# Altium PCB Copy of HARDWARE_V2.PcbDoc
Units mil, origin at the board's own origin, x right, y up, seen from the top; angles counter-clockwise.
Board outline 3937.01 x 2775 mil, 2 copper layers (Top Layer, Bottom Layer); 50 components, 31 nets, 227 pads, 22 vias.
Unrouted connection lines stored in the file: 27.
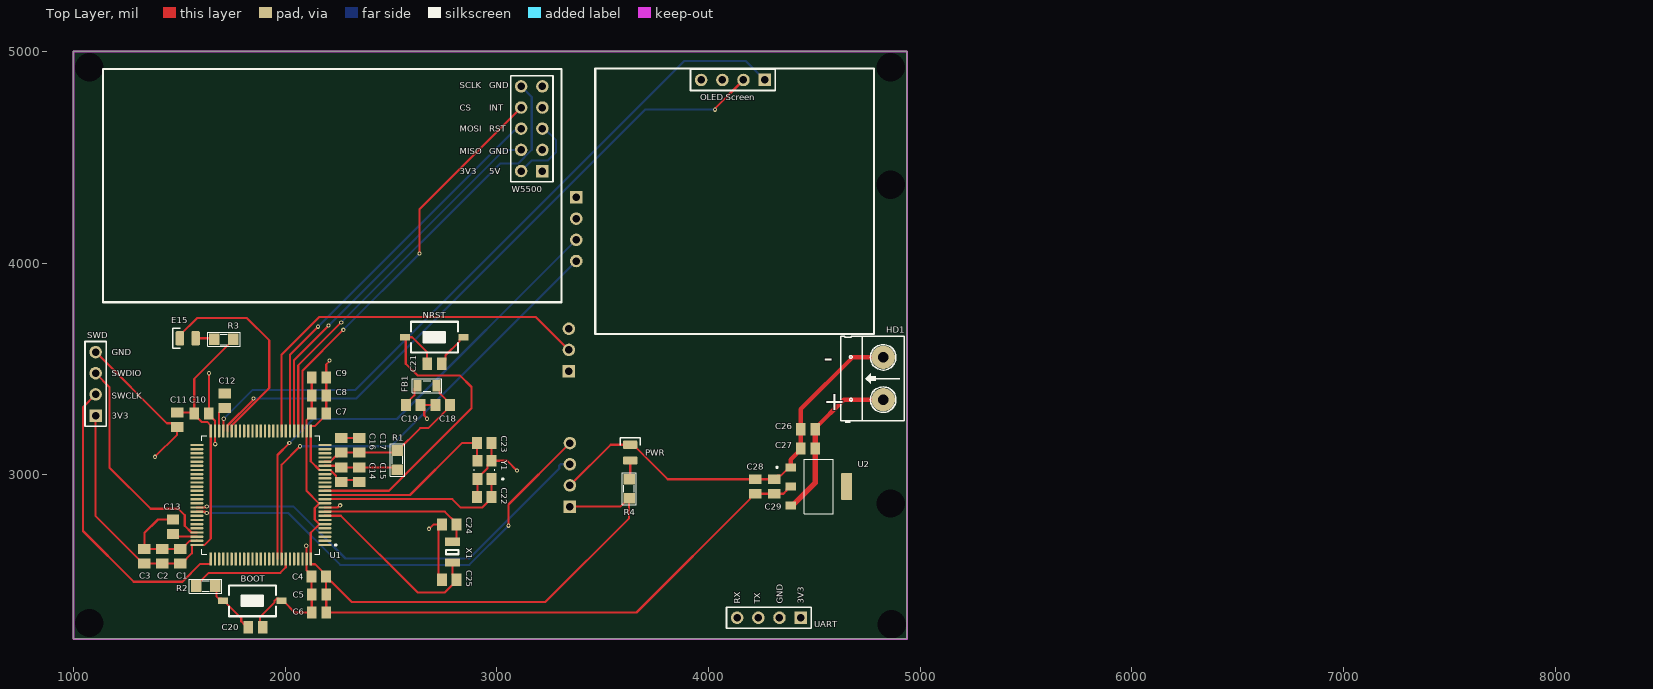
[diagram p0: Top Layer view]
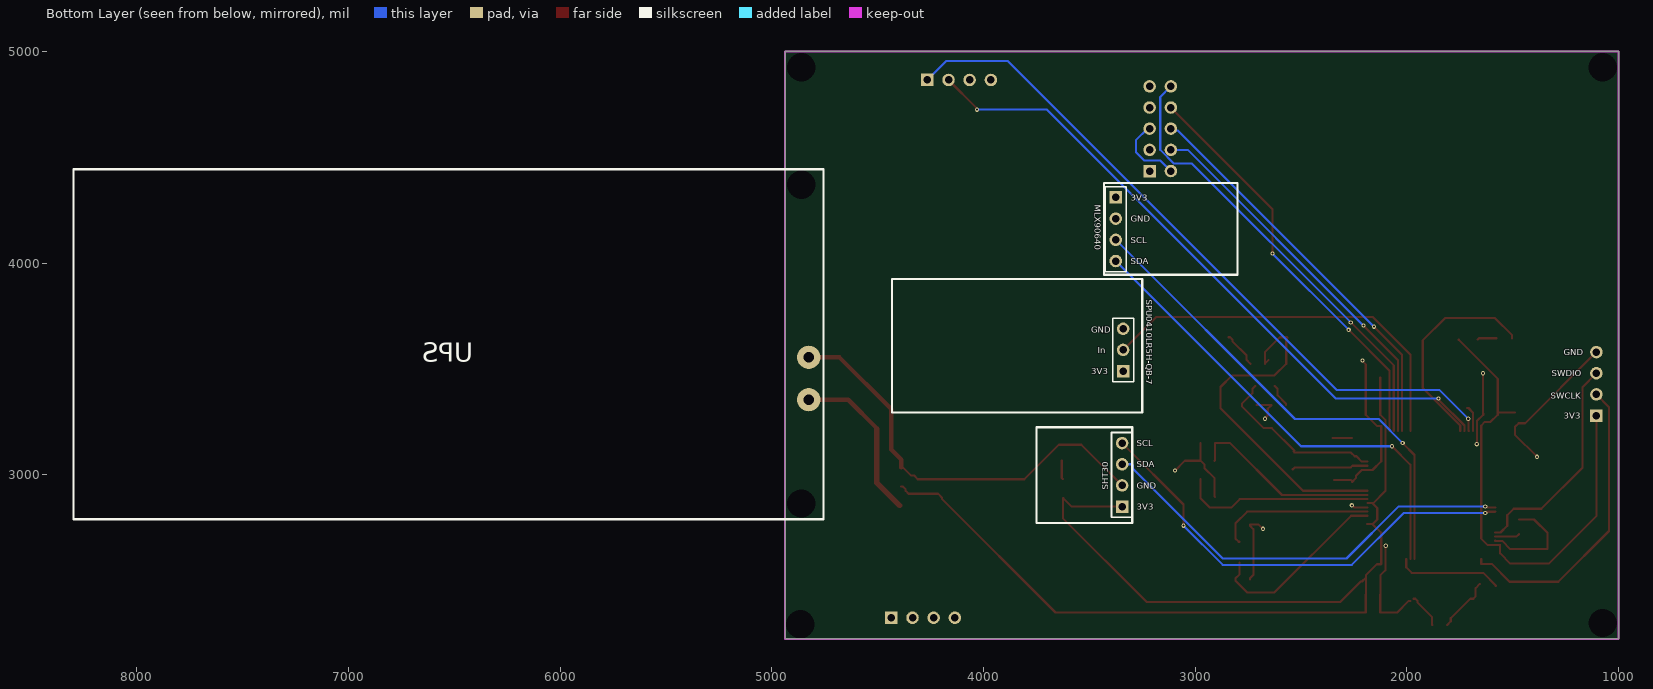
[diagram p1: Bottom Layer view, seen from below]

## Layer stack, top to bottom
Top Solder: solder mask 0.4, Solder Resist, Dk 3.5
Top Layer: signal copper 1.4
Dielectric 1: dielectric 12.6, FR-4, Dk 4.8
Bottom Layer: signal copper 1.4
Bottom Solder: solder mask 0.4, Solder Resist, Dk 3.5

## Board outline
1000,2225 1000,5000 4937.01,5000 4937.01,2225

## Design rules (kind name [scope] priority, off if disabled: settings)
Clearance [All] p1: gap=1 ignorepadtopadclearanceinfootprint=TRUE
Creepage [All] p1: checkdistance=10 applytopolygonpour=TRUE
PolygonConnect [All] p1: connectstyle=Relief reliefconductorwidth=10 reliefentries=4 polygonreliefangle="90 Angle" airgapwidth=10
RoutingVias [All] p1: holewidth=28 width=50 viastyle="Through Hole" minholewidth=28 minwidth=50 maxholewidth=28 maxwidth=50
SolderMaskExpansion [All] p1: expansion=4 istentingtop=FALSE
Width [All] p1: maxlimit=50 minlimit=10 preferedwidth=10 minimp=50.000000 maximp=50.000000 favimp=50.000000
30 further rules are at their usual default settings.

## Classes and differential pairs
component class Display: "OLED Screen" UART
component class Sensors: MLX90640 SHT30 SPU0410LR5H-QB-7
component class Power: C26 C27 C28 C29 HD1 PWR R4 U2
component class MCU: BOOT C1 C2 C3 C4 C5 C6 C7 C8 C9 C10 C11 C12 C13 C14 C15 C16 C17 C18 C19 C20 C21 C22 C23 C24 C25 E15 FB1 NRST R1 R2 R3 SWD U1 X1 Y1
component class Ethernet: W5500

## Components (designator, comment, footprint, x,y, rotation, side; value= is the part's Value field where it differs from the comment)
BOOT "SW-SMD" SW-SMD 1845,2405 r0 top
C1 "100nF" CAPC2012X145N 1505,2615 r270 top
C2 "100nF" CAPC2012X145N 1420,2615 r270 top
C3 "100nF" CAPC2012X145N 1335,2615 r270 top
C4 "100nF" CAPC2012X145N 2159.29,2520 r0 top
C5 "100nF" CAPC2012X145N 2160,2435 r0 top
C6 "100nF" CAPC2012X145N 2160,2350 r0 top
C7 "100nF" CAPC2012X145N 2160,3290 r180 top
C8 "100nF" CAPC2012X145N 2160,3375 r180 top
C9 "100nF" CAPC2012X145N 2160,3460 r180 top
C10 "100nF" CAPC2012X145N 1605,3290 r180 top
C11 "4.7uF" CAPC2012X145N 1490,3260 r90 top
C12 "2.2uF" CAPC2012X145N 1715,3350 r270 top
C13 "2.2uF" CAPC2012X145N 1470,2755 r270 top
C14 "100nF" CAPC2012X145N 2265,3000.71 r90 top
C15 "1uF" CAPC2012X145N 2350,3000.71 r90 top
C16 "100nF" CAPC2012X145N 2265,3140 r270 top
C17 "1uF" CAPC2012X145N 2350,3140 r270 top
C18 "100nF" CAPC2012X145N 2745,3330 r0 top
C19 "100nF" CAPC2012X145N 2605,3330 r180 top
C20 "100nF" CAPC2012X145N 1860,2280 r180 top
C21 "100nF" CAPC2012X145N 2705,3525 r180 top
C22 "10pF" CAPC2012X145N 2940,2895 r0 top
C23 "10pF" CAPC2012X145N 2940,3150 r180 top
C24 "10pF" CAPC2012X145N 2775,2765 r0 top
C25 "10pF" CAPC2012X145N 2775,2505 r0 top
C26 "100nF" CAPC2012X145N 4470,3215 r0 top
C27 "10uF" CAPC2012X145N 4470,3125 r0 top
C28 "100nF" CAPC2012X145N 4220,2945 r270 top
C29 "10uF" CAPC2012X145N 4310,2945 r270 top
E15 "BLUE" LED_0805_BLUE 1540,3645 r0 top
FB1 "Ferrit Bead" RES-SMD-0805 2670,3420 r180 top
HD1 "Header 2" HED2 4825,3355 r90 top
MLX90640 "Header 4" HDR1X4 3375,4310 r270 bottom
NRST "SW-SMD" SW-SMD 2705,3650 r0 top
"OLED Screen" "Header 4" HDR1X4 4265,4865 r180 top
PWR "BLUE" LED_0805_BLUE 3630,3105 r270 top
R1 "47" SM-0805 2530,3070 r90 top value=1K
R2 "10K" SM-0805 1625,2475 r0 top value=1K
R3 "10K" SM-0805 1710,3640 r180 top value=1K
R4 "10K" SM-0805 3625,2935 r90 top value=1K
SHT30 "Header 4" HDR1X4 3345,2850 r90 bottom
SPU0410LR5H-QB-7 "Header 3" HDR1X3 3340,3490 r90 bottom
SWD "Header 4" HDR1X4 1105,3280 r90 top
U1 "STM32H743VIT6" QFP50P1600X1600X160-100N 1885,2905 r180 top
U2 "AMS1117-3.3" SOT229P700X180-4N 4520,2945 r0 top
UART "Header 4" HDR1X4 4435,2325 r180 top
W5500 "Header 5X2" HDR2X5 3215,4435 r90 top
X1 "32.768kHz" XTAL_3215-2 2790,2635 r270 top
Y1 "25MHz" XTAL_ABM8G-25.000MHZ-B4Y-T 2941.54,3023.31 r180 top

## Footprints (in the part's own frame and the unit in brackets; to place one, negate y for a bottom-side part, rotate by r counter-clockwise, add the part's x,y. Pads: shape width x height; smd on the part's side, far side on the other; paste and mask are expansions set on the pad)
CAPC2012X145N [mm]
  rect 1.17x1.47 smd: 1(-0.871,0) 2(0.871,0)
  body extent -1,-0.63 1,0.63, height 1.45
HDR1X3 [mm] "Connector; Header; 3 Position"
  rect 1.5x1.5 hole 0.9: 1(0,0)
  round 1.5 hole 0.9: 2(2.54,0) 3(5.08,0)
  silkscreen extent -1.27,-1.27 6.35,1.27, body extent -1.27,-1.27 6.35,1.27, height 7
HDR1X4 [mm] "Connector; Header; 4 Position"
  rect 1.5x1.5 hole 0.9: 1(0,0)
  round 1.5 hole 0.9: 2(2.54,0) 3(5.08,0) 4(7.62,0)
  silkscreen extent -1.27,-1.27 8.89,1.27, body extent -1.27,-1.27 8.89,1.27, height 7
HDR2X5 [mm] "Connector; Header; 5x2 Position"
  rect 1.5x1.5 hole 0.9: 1(0,0)
  round 1.5 hole 0.9: 2(0,2.54) 3(2.54,0) 4(2.54,2.54) 5(5.08,0) 6(5.08,2.54) 7(7.62,0) 8(7.62,2.54) 9(10.16,0) 10(10.16,2.54)
  silkscreen extent -1.27,-1.27 11.43,3.81, body extent -1.27,-1.27 11.43,3.81, height 7
HED2 [mil] "Header 2, 2 pin, hight 300mil, Pin to Pin 200, Colour Green"
  round 110 hole 50: 1(0,0) 2(200,0)
  silkscreen extent -106,-100 300,200, body extent -92,-140 302,155, height 394
LED_0805_BLUE [mm]
  rrect25% 1x1.7 smd: A(0.95,0) K(-0.95,0)
  silkscreen extent -1.8,-1.2 -0.9,1.2, body extent -1,-0.63 1,0.63, height 1.12
QFP50P1600X1600X160-100N [mm]
  rrect50% 1.56x0.28 smd: 1(-7.68,6) 2(-7.68,5.5) 3(-7.68,5) 4(-7.68,4.5) 5(-7.68,4) 6(-7.68,3.5) 7(-7.68,3) 8(-7.68,2.5) 9(-7.68,2) 10(-7.68,1.5) 11(-7.68,1) 12(-7.68,0.5) 13(-7.68,0) 14(-7.68,-0.5) 15(-7.68,-1) 16(-7.68,-1.5) 17(-7.68,-2) 18(-7.68,-2.5) 19(-7.68,-3) 20(-7.68,-3.5) 21(-7.68,-4) 22(-7.68,-4.5) 23(-7.68,-5) 24(-7.68,-5.5) 25(-7.68,-6) 51(7.68,-6) 52(7.68,-5.5) 53(7.68,-5) 54(7.68,-4.5) 55(7.68,-4) 56(7.68,-3.5) 57(7.68,-3) 58(7.68,-2.5) 59(7.68,-2) 60(7.68,-1.5) 61(7.68,-1) 62(7.68,-0.5) 63(7.68,0) 64(7.68,0.5) 65(7.68,1) 66(7.68,1.5) 67(7.68,2) 68(7.68,2.5) 69(7.68,3) 70(7.68,3.5) 71(7.68,4) 72(7.68,4.5) 73(7.68,5) 74(7.68,5.5) 75(7.68,6)
  rrect50% 0.28x1.56 smd: 26(-6,-7.68) 27(-5.5,-7.68) 28(-5,-7.68) 29(-4.5,-7.68) 30(-4,-7.68) 31(-3.5,-7.68) 32(-3,-7.68) 33(-2.5,-7.68) 34(-2,-7.68) 35(-1.5,-7.68) 36(-1,-7.68) 37(-0.5,-7.68) 38(0,-7.68) 39(0.5,-7.68) 40(1,-7.68) 41(1.5,-7.68) 42(2,-7.68) 43(2.5,-7.68) 44(3,-7.68) 45(3.5,-7.68) 46(4,-7.68) 47(4.5,-7.68) 48(5,-7.68) 49(5.5,-7.68) 50(6,-7.68) 76(6,7.68) 77(5.5,7.68) 78(5,7.68) 79(4.5,7.68) 80(4,7.68) 81(3.5,7.68) 82(3,7.68) 83(2.5,7.68) 84(2,7.68) 85(1.5,7.68) 86(1,7.68) 87(0.5,7.68) 88(0,7.68) 89(-0.5,7.68) 90(-1,7.68) 91(-1.5,7.68) 92(-2,7.68) 93(-2.5,7.68) 94(-3,7.68) 95(-3.5,7.68) 96(-4,7.68) 97(-4.5,7.68) 98(-5,7.68) 99(-5.5,7.68) 100(-6,7.68)
  silkscreen extent -9.1,-7.1 7.1,7.1, body extent -8,-8 8,8, height 1.6
RES-SMD-0805 [mil]
  rect 39.37x55 smd: 1(-45,0) 2(45,0)
  silkscreen extent -70,-34 70,33, body extent -39,-25 39,25, height 31
SM-0805 [mil] "Compoment SMD 80x50mil"
  rect 50x55 smd: 1(-45,0) 2(45,0)
  silkscreen extent -77,-34 76,33, body extent -40,-27 40,23, height 24
SOT229P700X180-4N [mm]
  rrect15% 1.31x0.93 smd: 1(-3.345,2.29) 2(-3.345,0) 3(-3.345,-2.29)
  rrect15% 1.31x3.24 smd: 4(3.345,0)
  silkscreen extent -5.1,-3.25 1.75,3.25, body extent -3.25,-3.5 3.25,3.5, height 1.8
SW-SMD [mm] "Switch SMD type"
  rect 1.2x0.8 smd: 1(-3.5,0) 2(3.5,0)
  silkscreen extent -2.82,-1.85 2.82,1.85, body extent -3.05,-1.85 3.05,1.85, height 2.5
XTAL_3215-2 [mm]
  rrect10% 1x1.8 smd: 1(-1.25,0) 2(1.25,0)
  silkscreen extent -0.25,-0.75 0.25,0.75, body extent -1.6,-0.75 1.6,0.75, height 0.91
XTAL_ABM8G-25.000MHZ-B4Y-T [mm]
  rect 1.2x1.4 smd: 1(-0.85,1.1) 2(-0.85,-1.1) 3(0.85,-1.1) 4(0.85,1.1)
  silkscreen extent -2.3,-0.08 1.25,1.2, body extent -1.6,-1.24 1.6,1.24, height 0.99

## Part data
BOOT NRST: "Switch", LatestRevisionDate=17-Jul-2002, LatestRevisionNote="Re-released for DXP Platform.", PackageReference=SPST-2, Published=24-Mar-1999, Publisher="Altium Limited"
C1 C2 C3 C4 C5 C6 C7 C8 C9 C10 C12 C13 C14 C15 C16 C17 C18 C19 C20 C21 C22 C23 C24 C25 C26 C27 C28 C29: library part VJ0805A390GXCAP, "39 pF Â±2% 200V Ceramic Capacitor C0G, NP0 0805 (2012 Metric)", Package="2012 Vishay Vitramon", Check_prices=https://www.snapeda.com/parts/VJ0805A390GXCAP/Vishay/view-part/?ref=eda, MF="Vishay Vitramon", MP=VJ0805A390GXCAP, SnapEDA_Link=https://www.snapeda.com/parts/VJ0805A390GXCAP/Vishay/view-part/?ref=snap
C11: library part CAP_TAN_SMD, "Polazied Tantalum Capacitor"
E15 PWR: library part LED_0805_BLUE, "LED 0805 BLUE SMD"
FB1: "Generic Ferrit Bead"
HD1: library part Hed2, "Header 2 (Green)"
MLX90640 "OLED Screen" SHT30 SWD UART: "Header, 4-Pin", LatestRevisionDate=17-Jul-2002, LatestRevisionNote="Re-released for DXP Platform.", Publisher="Altium Limited"
R1 R2 R3 R4: library part RM, "Resistor SMD"
SPU0410LR5H-QB-7: "Header, 3-Pin", LatestRevisionDate=17-Jul-2002, LatestRevisionNote="Re-released for DXP Platform.", Publisher="Altium Limited"
U1: "ARMÂ® CortexÂ®-M7 STM32H7 Microcontroller IC 32-Bit Single-Core 480MHz 2MB (2M x 8) FLASH 100-LQFP (14x14)", Package="LQFP-100 STMicroelectronics", Check_prices=https://www.snapeda.com/parts/STM32H743VIT6/STMicroelectronics/view-part/?ref=eda, MF=STMicroelectronics, MP=STM32H743VIT6, SnapEDA_Link=https://www.snapeda.com/parts/STM32H743VIT6/STMicroelectronics/view-part/?ref=snap
U2: "Sot223/Pkg 1-Amp 3.3-Volt Low Drop Out Voltage Regulatator", Package="SOT-223 Seeed Technology", Check_prices=https://www.snapeda.com/parts/AMS1117-3.3/Advanced+Monolithic+Systems/view-part/?ref=eda, MF="Advanced Monolithic Systems", MP=AMS1117-3.3, SnapEDA_Link=https://www.snapeda.com/parts/AMS1117-3.3/Advanced+Monolithic+Systems/view-part/?ref=snap
W5500: "Header, 5-Pin, Dual row", LatestRevisionDate=17-Jul-2002, LatestRevisionNote="Re-released for DXP Platform.", Publisher="Altium Limited"
X1: library part XTAL_3215, "Crystal SMD 3215"
Y1: library part ABM8G-25.000MHZ-B4Y-T, "25 MHz Â±30ppm Crystal 10pF 60 Ohms 4-SMD, No Lead", Package="SMD-4 Abracon", Availability="In Stock", Check_prices=https://www.snapeda.com/parts/ABM8G-25.000MHZ-B4Y-T/Abracon+LLC/view-part/?ref=eda, MF=Abracon, MP=ABM8G-25.000MHZ-B4Y-T, Price=None, Purchase-URL=https://pricing.snapeda.com/search/part/ABM8G-25.000MHZ-B4Y-T/?ref=eda, SnapEDA_Link=https://www.snapeda.com/parts/ABM8G-25.000MHZ-B4Y-T/Abracon+LLC/view-part/?ref=snap

## Free pads (board coordinates)
  round 60 hole 133.86 unplated: 2(4865,2295) 3(4860,2865) 4(4860,4370) 5(4860,4925) 6(1075,4925) 7(1075,2300)

## Via types
v1: diameter 20, hole 10, Top Layer to Bottom Layer, 22 vias

## Nets (pads, with @x,y where several pads share a name; then routed paths per layer and width w, separated by ;. In a path a pad name is that pad's centre, name@x,y a point inside that pad or via, vN(x,y) a via of type N, cw(c..) or ccw(c..) an arc to the next point about the centre after c; other vN are vias at no path point)
12V: C26.2 C27.2 HD1.1 U2.3 | length 794.7
  Top Layer w10: U2.3 U2.3@4395.79,2854.84
  Top Layer w20: C26.2 4504.29,3220.91 4638.39,3355 HD1.1
  Top Layer w25: U2.3@4395.79,2854.84 4504.29,2963.35 C27.2 C26.2
+3V3: "OLED Screen.3" C1.2 C2.2 C3.2 C4.2 C5.2 C6.2 C7.2 C8.2 C9.2 C10.2 C11.2 C19.2 C28.2 C29.2 FB1.2 MLX90640.1 R3.1 R4.1 SHT30.1 SPU0410LR5H-QB-7.1 SWD.1 U1.6 U1.11 U1.27 U1.50 U1.75 U1.100 U2.2 UART.1 W5500.2 W5500.5 | length 8545.6
  Top Layer w10: SWD.1 1105,2804.8 1329.09,2580.71 C3.2 C2.2 C1.2 1510.91,2580.71 1559.69,2629.49 1559.69,2668.27 1560.2,2668.78 U1.75 ; C11.2 1566.42,3294.29 C10.2 ; U1.75@1582.64,2667.95 1617.95,2667.95 1648.78,2698.79 U1.50 1648.78,3232.56 1631.34,3250 1604.8,3250 1570.71,3284.09 C10.2 ; R3.1 1755,3637.5 1570.71,3453.21 C10.2 ; C9.2 C8.2 C7.2 2125.71,3284.09 2101.54,3259.92 U1.27 2101.54,2923.92 2159.32,2866.14 U1.11@2162.68,2866.14 ; U1.11@2186.85,2866.14 U1.11@2162.68,2866.14 ; U1.6 U1.6@2162.17,2767.2 ; C19.2 2570.71,3335.91 2610.32,3375.51 2610.32,3405.31 FB1.2 ; SHT30.1 3582.5,2850 3622.5,2890 R4.1 3625,2795 3230,2400 2313.58,2400 2217.52,2496.06 2211.61,2496.06 C4.2@2193.58,2514.09 ; U2.2 4380.83,2945 4367.52,2931.69 4367.52,2924.29 4353.94,2910.71 C29.2 4214.09,2910.71 4196.06,2892.68 4196.06,2886.77 3659.29,2350 C6.2 C5.2 2193.58,2435.71 C4.2@2193.58,2514.09 ; U1.6@2162.17,2767.2 2140,2789.37 2140,2843.46 U1.11@2162.68,2866.14 ; U1.6@2162.17,2767.2 2121.22,2726.26 U1.100 2121.22,2578.27 2121.73,2577.76 2141.73,2577.76 2193.58,2525.91 C4.2 C4.2@2193.58,2514.09
  Bottom Layer w10: W5500.2 3164.69,4484.69 3239.69,4484.69 3280,4525 3280,4580 3225,4635 W5500.5
ADC1_IN8: SPU0410LR5H-QB-7.2 U1.33 | length 1855
  Top Layer w10: U1.33 1983.43,3568.43 2160,3745 3185,3745 SPU0410LR5H-QB-7.2
BOOT0: R2.1 U1.94 | length 500.6
  Top Layer w10: R2.1 1580,2477.5 1639.71,2537.21 1977.21,2537.21 2003.11,2563.11 U1.94
GND: "OLED Screen.4" BOOT.2 C1.1 C2.1 C3.1 C4.1 C5.1 C6.1 C7.1 C8.1 C9.1 C10.1 C11.1 C12.1 C13.1 C14.1 C15.1 C16.1 C17.1 C18.1 C19.1 C20.1 C21.1 C22.1 C23.1 C24.1 C25.1 C26.1 C27.1 C28.1 C29.1 HD1.2 MLX90640.2 NRST.2 PWR.K SHT30.2 SPU0410LR5H-QB-7.3 SWD.4 U1.10 U1.19 U1.26 U1.49 U1.74 U1.99 U2.1 UART.2 W5500.9 Y1.2 Y1.4 | length 6265.5
  Top Layer w10: SWD.4 1441.26,3243.74 1471.97,3243.74 C11.1 1490,3190 v1(1385,3085) ; C13.1 1399.29,2789.29 1335,2725 C3.1 C2.1 C1.1 1510.91,2649.29 1549.57,2687.95 1582.13,2687.95 U1.74 ; v1(1640,3480) 1640,3290.71 C10.1 1639.29,3284.09 1668.46,3254.92 U1.49 1668.98,3206.85 1668.98,3146.02 v1(1670,3145) ; C20.1@1879.29,2290 1880.87,2291.58 1880.87,2328.08 1949.17,2396.38 1949.17,2404.25 1959.92,2415 BOOT.2@1967.8,2415 ; BOOT.2 1990.67,2405 2045.67,2350 C6.1 C5.1 2125,2435.71 C4.1 2125,2525.91 2101.54,2549.37 U1.99 2101.02,2603.15 2101.02,2663.98 v1(2100,2665) ; U1.10 2247.24,2845.94 2257.29,2856 v1(2260,2856) ; v1(2210,3540) 2210,3537.29 2194.29,3521.59 C9.1 C8.1 C7.1 2194.29,3284.09 2141.73,3231.54 2121.73,3231.54 2121.22,3231.02 U1.26 2121.22,3064.06 2162.17,3023.11 U1.19 2212.56,3023.11 2241.06,2994.61 2241.06,2984.45 C14.1@2259.09,2966.42 ; C16.1@2259.09,3174.29 C16.1 C17.1 ; C14.1@2265,2975.71 C15.1@2345,2975.71 ; v1(2670,3265) 2670,3267.71 2657.32,3280.38 2657.32,3311.97 C19.1 C18.1 ; v1(2680,2745) 2700,2765 C24.1 2740.71,2759.09 2725,2743.39 2725,2526.61 2740.71,2510.91 C25.1 ; C21.1 2757.32,3543.03 2757.32,3564.53 2824.17,3631.38 2824.17,3639.25 2834.92,3650 NRST.2 ; C22.1 2908.07,2897.36 Y1.4 2908.07,2983.94 2956.38,3032.24 2956.38,3049.41 2974.29,3067.32 C23.1 ; Y1.2 3048.39,3066.61 v1(3095,3020) ; SHT30.2 3537.4,3142.4 PWR.K 3643.78,3142.4 3806.89,2979.29 C28.1 C29.1 4328.03,2997.32 4342.99,2997.32 4380.83,3035.16 U2.1 ; C27.1@4435.71,3119.09 C27.1
  Top Layer w20: U2.1 4388.31,3071.69 C27.1@4435.71,3119.09 ; C27.1 C26.1 4435,3215.71 4435,3310 4680,3555 HD1.2
HSE_IN: C22.2 U1.12 Y1.1 | length 913.1
  Top Layer w10: U1.12 2789.69,2885.32 2830,2845 2930.2,2845 2975,2889.8 Y1.1
HSE_OUT: C23.2 U1.13 Y1.3 | length 904.2
  Top Layer w10: U1.13 2590,2905 2835,3150 C23.2 2905.71,3068.98 Y1.3
I2C1_SCL: MLX90640.3 U1.92 | length 2323.3
  Top Layer w10: U1.92 1963.74,3093.74 v1(2020,3150)
  Bottom Layer w10: v1(2020,3150) 2133.46,3263.46 2528.46,3263.46 MLX90640.3
I2C1_SDA: MLX90640.4 U1.93 | length 2235.7
  Top Layer w10: U1.93 1983.43,3048.43 v1(2070,3135)
  Bottom Layer w10: v1(2070,3135) 2500,3135 MLX90640.4
I2C2_SCL: "OLED Screen.2" U1.46 | length 3144.7
  Top Layer w10: U1.46 1728.03,3207.87 1728.03,3233.07 1848.09,3353.13 1848.09,3358.09 v1(1850,3360) ; v1(4030,4725) 4031.91,4726.91 4031.91,4731.91 4165,4865
  Bottom Layer w10: v1(1850,3360) 2335,3360 3700,4725 v1(4030,4725)
I2C2_SDA: "OLED Screen.1" U1.47 | length 3350.8
  Top Layer w10: U1.47 1708.35,3207.87 1708.35,3263.35 v1(1710,3265)
  Bottom Layer w10: v1(1710,3265) 1845,3400 2330,3400 3885,4955 4175,4955 4265,4865
I2C3_SCL: SHT30.4 U1.67 | length 2163.2
  Top Layer w10: U1.67 1583.15,2825.75 1621.55,2825.75 1627.29,2820 v1(1630,2820) ; v1(3055,2760) 3055,2860 SHT30.4
  Bottom Layer w10: v1(1630,2820) 2015,2820 2260,2575 2870,2575 v1(3055,2760)
I2C3_SDA: SHT30.3 U1.66 | length 2058.1
  Top Layer w10: U1.66 1583.15,2846.46 1623.75,2846.46 1627.29,2850 v1(1630,2850)
  Bottom Layer w10: v1(1630,2850) 2040,2850 2285,2605 2870,2605 3295,3030 3295,3044.14 3300.86,3050 SHT30.3
LED: E15.K U1.45 | length 1014.6
  Top Layer w10: E15.K 1502.6,3658.78 1583.82,3740 1820,3740 1925,3635 1925,3410.35 1747.72,3233.07 1747.72,3207.87 U1.45
LSE_IN: C24.2 U1.9 X1.1 | length 742.2
  Top Layer w10: U1.9 2753.94,2826.26 2809.29,2770.91 C24.2 2809.29,2698.9 2794.61,2684.21 X1.1
LSE_OUT: C25.2 U1.8 X1.2 | length 888.8
  Top Layer w10: U1.8 2263.43,2806.57 2625,2445 2755.2,2445 2809.29,2499.09 C25.2 2809.29,2510.91 2790,2530.2 X1.2
NetBOOT_1: BOOT.1 C20.2 R2.2 | length 267.9
  Top Layer w10: R2.2@1655,2485 1675,2465 1675,2425.75 1685.75,2415 1692.2,2415 1700.08,2415 1792.68,2322.4 1792.68,2308.03 C20.2@1810.71,2290
NetE15_A: E15.A R3.2 | length 89.7
  Top Layer w10: E15.A 1660,3645 R3.2
NetPWR_A: PWR.A R4.2 | length 89.7
  Top Layer w10: R4.2 3630,2985 PWR.A
NRST: C21.2 NRST.1 U1.14 | length 1651
  Top Layer w10: U1.14 2490.67,2924.69 2880,3314.01 2880,3415 2825,3470 2625,3470 2570,3525 2570,3642.8 2565,3647.8 NRST.1 2600,3650 2670.71,3579.29 C21.2 C21.2@2652.68,3543.03
RX: U1.54 UART.4
SPI1_CS: U1.28 W5500.8 | length 1955.6
  Top Layer w10: U1.28 2081.85,3491.85 v1(2275,3685) ; v1(2634.95,4044.95) 2634.95,4254.95 W5500.8
  Bottom Layer w10: v1(2275,3685) v1(2634.95,4044.95)
SPI1_MISO: U1.30 W5500.4 | length 1818.8
  Top Layer w10: U1.30 2042.48,3542.48 v1(2205,3705)
  Bottom Layer w10: v1(2205,3705) 3035,4535 W5500.4
SPI1_MOSI: U1.31 W5500.6 | length 1894.7
  Top Layer w10: U1.31 2022.8,3567.8 v1(2155,3700)
  Bottom Layer w10: v1(2155,3700) 3081.01,4626.01 3106.01,4626.01 W5500.6
SPI1_SCLK: U1.29 W5500.10 | length 2155.1
  Top Layer w10: U1.29 2062.17,3517.17 v1(2265,3720)
  Bottom Layer w10: v1(2265,3720) 3015.53,4470.53 3100.77,4470.53 3165,4534.76 3165,4785 W5500.10
SWCLK: SWD.2 U1.76 | length 1430.8
  Top Layer w10: SWD.2 1045,3320 1045,2735 1285,2495 1515,2495 1599.69,2579.69 1648.27,2579.69 1648.78,2580.2 U1.76
SWDIO: SWD.3 U1.72 | length 1040.9
  Top Layer w10: SWD.3 1170,3415 1170,3035 1365,2840 1495,2840 1525.96,2809.04 1525.96,2759.31 1557.44,2727.83 U1.72
TX: U1.53 UART.3
VCAP: C12.2 C13.2 U1.48 U1.73 | length 240.8
  Top Layer w10: C13.2 1482.56,2708.15 U1.73 ; U1.48 1688.15,3294.76 1709.09,3315.71 C12.2
VDDA: C16.2 C17.2 C18.2 FB1.1 R1.2 U1.21 | length 825.8
  Top Layer w10: U1.21 2212.56,3062.48 2237.76,3087.68 2246.97,3087.68 C16.2 C17.2 2530.71,3105.71 R1.2@2535,3110 ; R1.2 2532.5,3115 2638.03,3220.53 2675.73,3220.53 2779.29,3324.09 C18.2 2779.29,3335.91 2729.69,3385.51 2729.69,3405.31 FB1.1
VREF: C14.2 C15.2 R1.1 U1.20 | length 360
  Top Layer w10: U1.20 2257.2,3042.8 C14.2 C15.2 2530,3035 R1.1@2540,3025
pads on no net: U1.1 U1.2 U1.3 U1.4 U1.5 U1.7 U1.15 U1.16 U1.17 U1.18 U1.22 U1.23 U1.24 U1.25 U1.32 U1.34 U1.35 U1.36 U1.37 U1.38 U1.39 U1.40 U1.41 U1.42 U1.43 U1.44 U1.51 U1.52 U1.55 U1.56 U1.57 U1.58 U1.59 U1.60 U1.61 U1.62 U1.63 U1.64 U1.65 U1.68 U1.69 U1.70 U1.71 U1.77 U1.78 U1.79 U1.80 U1.81 U1.82 U1.83 U1.84 U1.85 U1.86 U1.87 U1.88 U1.89 U1.90 U1.91 U1.95 U1.96 U1.97 U1.98 U2.4 W5500.1 W5500.3 W5500.7

## Keep-outs
Keep-Out Layer:
  the board outline again, w10

## Silkscreen, mask and mechanical layers (free items; w line width, h text height)
Top Overlay:
  lines w10: 1139.65,3815 3305,3815 3305,4917.36 1139.65,4917.36 1139.65,3815 ; 3465,3665 4780.75,3665 4780.75,4920.12 3465,4920.12 3465,3665
  text "SCLK" at 2825,4825 h30
  text "GND" at 2965,4825 h30
  text "CS" at 2825,4720 h30
  text "INT" at 2965,4720 h30
  text "MOSI" at 2825,4620 h30
  text "RST" at 2965,4620 h30
  text "MISO" at 2825,4515 h30
  text "GND" at 2965,4515 h30
  text "3V3" at 2825,4420 h30
  text "5V" at 2965,4420 h30
  text "GND" at 1180,3565 h30
  text "-" at 4545,3510.01 h90
  text "SWDIO" at 1180,3465 h30
  text "SWCLK" at 1180,3360 h30
  text "+" at 4545,3305 h90
  text "3V3" at 1180,3265 h30
  text "RX" at 4150,2390 h30 r90
  text "TX" at 4245,2390 h30 r90
  text "GND" at 4350,2390 h30 r90
  text "3V3" at 4450,2390 h30 r90
Bottom Overlay:
  lines w10: 2800,3945 3429.92,3945 3429.92,4378.07 2800,4378.07 2800,3945 ; 3250,3295 4431.1,3295 4431.1,3924.92 3250,3924.92 3250,3295 ; 3297.24,2772.24 3750,2772.24 3750,3225 3297.24,3225 3297.24,2772.24 ; 4755,2790 8298.31,2790 8298.31,4443.54 4755,4443.54 4755,2790
  text "3V3" at 3305,4295 h30
  text "GND" at 3305,4195 h30
  text "SCL" at 3305,4095 h30
  text "SDA" at 3305,3995 h30
  text "GND" at 3490,3670 h30
  text "In" at 3460,3575 h30
  text "GND" at 1260,3565 h30
  text "UPS" at 6410,3535 h90
  text "3V3" at 3490,3475 h30
  text "SWDIO" at 1315,3465 h30
  text "SWCLK" at 1320,3360 h30
  text "3V3" at 1260,3265 h30
  text "SCL" at 3275,3135 h30
  text "SDA" at 3275,3035 h30
  text "GND" at 3275,2935 h30
  text "3V3" at 3275,2835 h30

## Text inside footprints (layer, text, board x,y; h text height)
E15: Mechanical 13 "+" at 1609.56,3684.38 h39.37
PWR: Mechanical 13 "+" at 3550.32,3033.12 h39.37 r270